# Altium PCB SP3232_module.PcbDoc
Units mm, origin at the board's own origin, x right, y up, seen from the top; angles counter-clockwise.
Board outline 29.34 x 20 mm, 2 copper layers (Top Layer, Bottom Layer), stack 1.569 mm thick; 9 components, 16 nets, 40 pads, 0 vias.
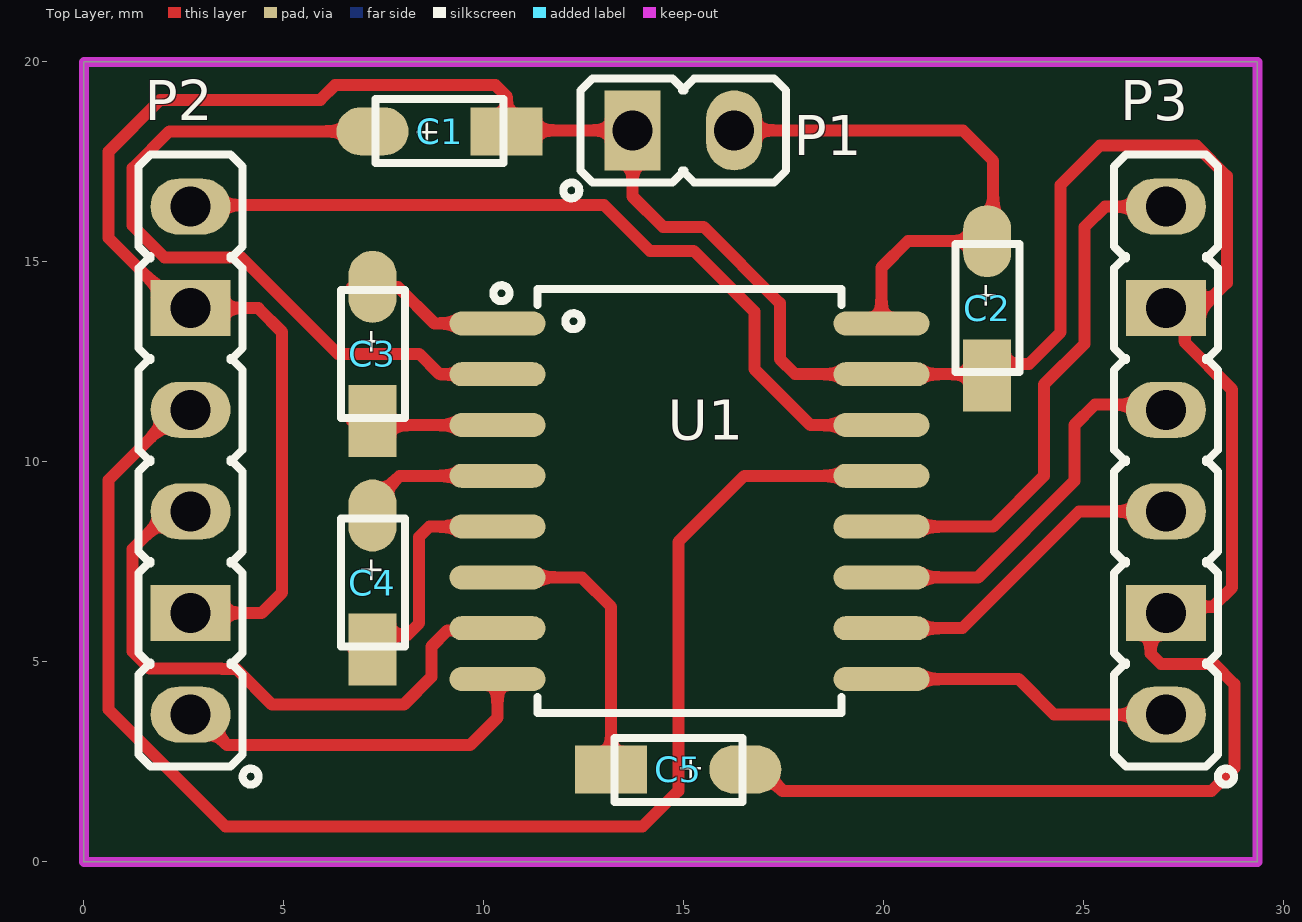
[diagram p0: Top Layer view]
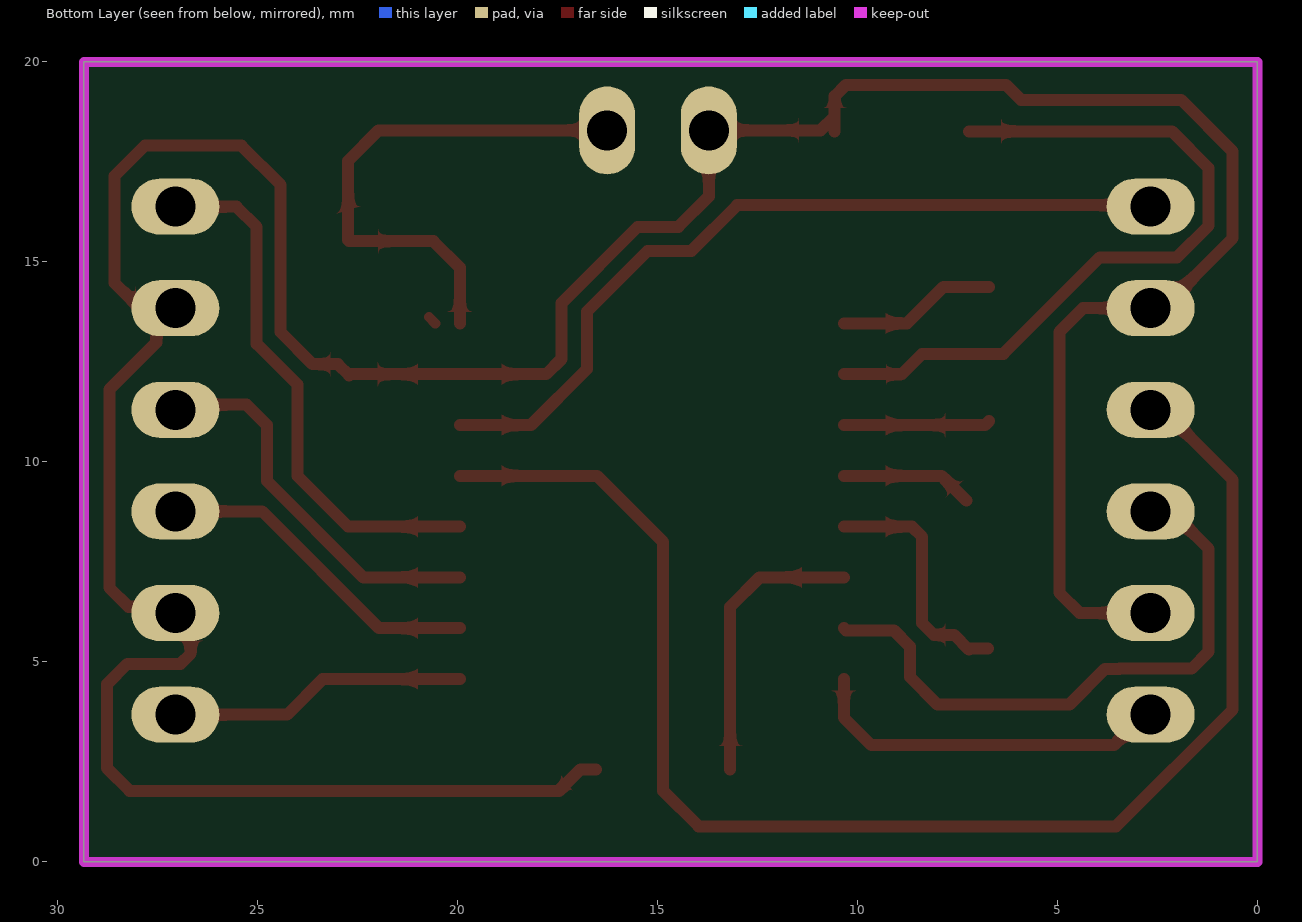
[diagram p1: Bottom Layer view, seen from below]
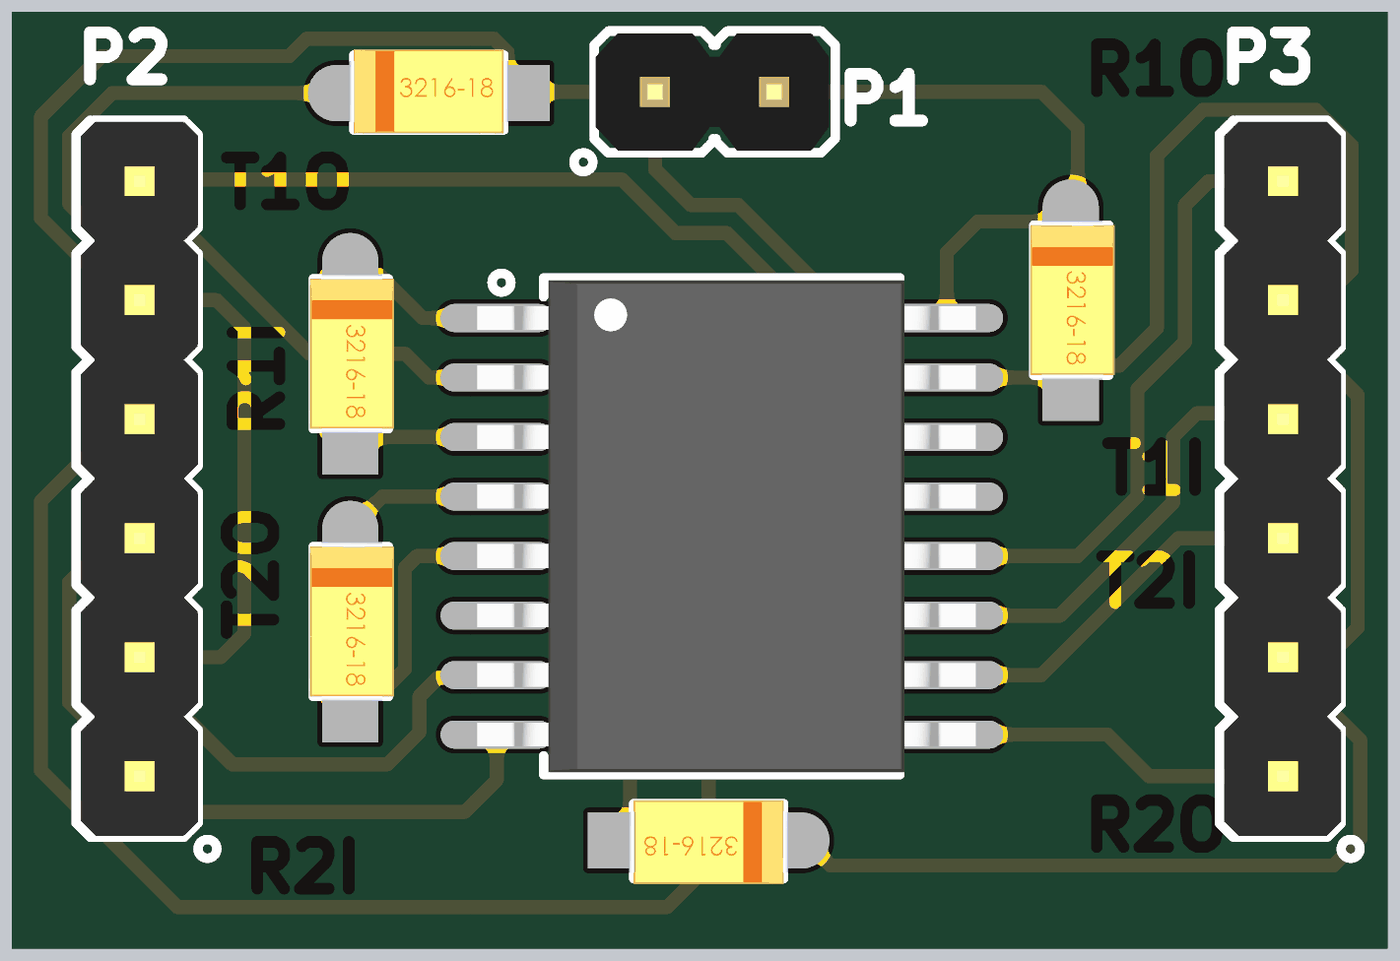
[diagram p2: 3D render of the assembled board from above, using the file's embedded part models]

## Layer stack, top to bottom
Top Solder: solder mask 0.0254, SM-001, Dk 4
Top Layer: signal copper 0.035
Dielectric 1: core 1.4986, Core-043, Dk 4.3
Bottom Layer: signal copper 0.035
Bottom Solder: solder mask 0.0254, SM-001, Dk 4

## Board outline
0,0 0,20 29.337,20 29.337,0

## Design rules (kind name [scope] priority, off if disabled: settings)
Clearance [All] p1: gap=0.3 ignorepadtopadclearanceinfootprint=FALSE
PolygonConnect [All] p1: connectstyle=Relief reliefconductorwidth=0.254 reliefentries=4 polygonreliefangle="90 Angle" airgapwidth=0.254
RoutingVias [All] p1: holewidth=0.711 width=1.27 viastyle="Through Hole" minholewidth=0.711 minwidth=1.27 maxholewidth=0.711 maxwidth=1.27
SolderMaskExpansion [All] p1: expansion=0.102 istentingtop=FALSE
Width [All] p1: maxlimit=0.3 minlimit=0.3 preferedwidth=0.3
30 further rules are at their usual default settings.

## Components (designator, comment, footprint, x,y, rotation, side; value= is the part's Value field where it differs from the comment)
C1 "100nf" CAP_SMD_A 8.89,18.288 r0 top
C2 "100nf" CAP_SMD_A 22.606,13.843 r270 top
C3 "100nf" CAP_SMD_A 7.239,12.7 r270 top
C4 "100nf" CAP_SMD_A 7.239,6.985 r270 top
C5 "100nf" CAP_SMD_A 14.859,2.286 r180 top
P1 "Header 2" HDR_M_1X2 14.986,18.288 r0 top
P2 "Header 6" HDR_M_1X6 2.667,10.033 r90 top
P3 "Header 6" HDR_M_1X6 27.051,10.033 r90 top
U1 "SP3232E" so_16_w 15.139,9.017 r0 top

## Footprints (in the part's own frame and the unit in brackets; to place one, negate y for a bottom-side part, rotate by r counter-clockwise, add the part's x,y. Pads: shape width x height; smd on the part's side, far side on the other; paste and mask are expansions set on the pad)
CAP_SMD_A [mm]
  oval 1.8x1.2 smd: 1(-1.676,-0.025)
  rect 1.8x1.2 smd: 2(1.676,-0.025)
  silkscreen extent -1.6,-0.81 1.6,0.79, body extent -1.7,-0.89 1.7,0.91, height 1.7
HDR_M_1X2 [mm] "Connector; Header; 2 Position"
  rect 1.4x2 / inner round 1.4 / far side oval 1.4x2.2 hole 1 mask+0.1: 1(-1.27,0)
  oval 1.4x2 / inner round 1.4 / far side oval 1.4x2.2 hole 1 mask+0.1: 2(1.27,0)
  silkscreen extent -3,-1.7 2.57,1.3, body extent -2.54,-1.25 2.44,1.25, height 8.72
HDR_M_1X6 [mm] "Connector; Header; 6 Position"
  oval 1.4x2 / inner round 1.4 / far side oval 1.4x2.2 hole 1 mask+0.1: 1(-6.35,0) 3(-1.27,0) 4(1.27,0) 6(6.35,0)
  rect 1.4x2 / inner round 1.4 / far side oval 1.4x2.2 hole 1 mask+0.1: 2(-3.81,0) 5(3.81,0)
  silkscreen extent -8.1,-1.7 7.65,1.3, body extent -7.62,-1.3 7.62,1.19, height 8.54
so_16_w [mm] "SOP, SOIC, 7.5mm width, 1.27mm pitch,"
  oval 2.4x0.6 smd: 1(-4.8,4.445) 2(-4.8,3.175) 3(-4.8,1.905) 4(-4.8,0.635) 5(-4.8,-0.635) 6(-4.8,-1.905) 7(-4.8,-3.175) 8(-4.8,-4.445) 9(4.8,-4.445) 10(4.8,-3.175) 11(4.8,-1.905) 12(4.8,-0.635) 13(4.8,0.635) 14(4.8,1.905) 15(4.8,3.175) 16(4.8,4.445)
  silkscreen extent -4.9,-5.3 3.8,5.4, body extent -5.21,-5.25 5.42,5.25, height 2.62

## Part data
C1 C2 C3 C4 C5: library part Cap2, "Capacitor, pol", PackageDescription="Capacitor; 2 Leads", PackageReference=CAPR5-4X5, Published=23-Sep-2002, Publisher="Altium Limited"
P1: "Header, 2-Pin", LatestRevisionDate=17-Jul-2002, LatestRevisionNote="Re-released for DXP Platform.", Publisher="Altium Limited"
P2 P3: "Header, 6-Pin", LatestRevisionDate=17-Jul-2002, LatestRevisionNote="Re-released for DXP Platform.", Publisher="Altium Limited"
U1: "TTL to RS232 converter and vise versa"

## Nets (pads, with @x,y where several pads share a name; then routed paths per layer and width w, separated by ;. In a path a pad name is that pad's centre, name@x,y a point inside that pad or via, vN(x,y) a via of type N, cw(c..) or ccw(c..) an arc to the next point about the centre after c; other vN are vias at no path point)
GND: C1.2 C2.2 C5.1 P1.1 P2.2 P2.5 P3.2 P3.5 U1.15 | length 87.7
  Top Layer w0.3: P2.2 4.445,6.223 4.953,6.731 4.953,13.248 4.358,13.843 2.367,13.843 0.617,15.593 0.617,17.762 1.905,19.05 5.91,19.05 6.283,19.423 10.287,19.423 10.566,19.144 C1.2@10.566,18.644 ; C1.2 C1.2@10.566,18.644 ; C5.1 16.928,2.311 17.461,1.778 28.194,1.778 28.76,2.344 28.76,4.445 28.252,4.953 26.924,4.953 26.67,5.207 P3.2@26.67,6.223 ; P3.2 27.206,6.378 28.222,6.378 28.702,6.858 28.702,11.811 27.524,12.989 27.524,13.37 P3.5 27.94,13.843 28.575,14.478 28.575,17.145 27.813,17.907 25.4,17.907 24.419,16.926 24.419,13.243 23.622,12.446 22.987,12.446 22.708,12.167 22.682,12.192 U1.15 17.78,12.192 17.399,12.573 17.399,13.97 15.494,15.875 14.478,15.875 13.716,16.637 P1.1 10.922,18.288 C1.2@10.566,18.644
NetC1_1: C1.1 U1.2 | length 18.5
  Top Layer w0.3: C1.1 2.134,18.263 1.217,17.346 1.217,15.907 2.011,15.113 3.937,15.113 6.35,12.7 8.382,12.7 8.89,12.192 U1.2
NetC3_1: C3.1 U1.1 | length 4
  Top Layer w0.3: C3.1@6.706,14.376 7.849,14.376 8.763,13.462 U1.1
NetC3_2: C3.2 U1.3 | length 3.7
  Top Layer w0.3: C3.2@6.706,11.024 6.807,10.922 U1.3
NetC4_1: C4.1 U1.4 | length 3.3
  Top Layer w0.3: C4.1@7.277,9.035 7.894,9.652 U1.4
NetC4_2: C4.2 U1.5 | length 6.1
  Top Layer w0.3: C4.2@6.731,5.334 C4.2@7.214,5.334 ; C4.2 7.58,5.675 8.088,5.675 8.382,5.969 8.382,8.128 8.636,8.382 U1.5
NetC5_2: C5.2 U1.6 | length 7.2
  Top Layer w0.3: U1.6 12.446,7.112 13.183,6.375 C5.2
R1IN: P2.4 U1.13 | length 36.3
  Top Layer w0.3: P2.4 2.367,11.303 0.617,9.553 0.617,3.807 3.535,0.889 13.97,0.889 14.859,1.778 14.859,8.001 16.51,9.652 U1.13
R1OUT: P3.6 U1.12 | length 13.1
  Top Layer w0.3: U1.12 22.733,8.382 24.003,9.652 24.003,11.938 25.019,12.954 25.019,15.875 25.527,16.383 P3.6@26.67,16.383
R2IN: P2.1 U1.8 | length 9.2
  Top Layer w0.3: P2.1 2.821,3.683 3.583,2.921 9.652,2.921 10.339,3.608 U1.8
R2OUT: P3.1 U1.9 | length 7.1
  Top Layer w0.3: U1.9 23.368,4.572 24.257,3.683 P3.1@26.67,3.683
T1IN: P3.4 U1.11 | length 9.4
  Top Layer w0.3: U1.11 22.352,7.112 24.765,9.525 24.765,10.922 25.273,11.43 26.543,11.43 P3.4@26.67,11.303
T1OUT: P2.6 U1.14 | length 20.4
  Top Layer w0.3: P2.6 2.702,16.418 13.006,16.418 14.149,15.275 15.245,15.275 16.764,13.756 16.764,12.319 18.161,10.922 U1.14
T2IN: P3.3 U1.10 | length 7.9
  Top Layer w0.3: U1.10 21.959,5.842 24.88,8.763 P3.3@26.67,8.763
T2OUT: P2.3 U1.7 | length 15.3
  Top Layer w0.3: P2.3 2.155,8.763 1.217,7.825 1.217,5.26 1.644,4.833 3.443,4.833 3.45,4.826 3.81,4.826 4.699,3.937 8.001,3.937 8.689,4.625 8.689,5.387 9.087,5.785 10.282,5.785 U1.7
VCC: C2.1 P1.2 U1.16 | length 13.5
  Top Layer w0.254: U1.16@20.552,13.462 U1.16@20.712,13.622
  Top Layer w0.3: P1.2 21.971,18.288 22.733,17.526 22.733,15.545 22.708,15.519 20.599,15.519 19.939,14.859 U1.16

## Keep-outs
Keep-Out Layer:
  the board outline again, w0.254

## Silkscreen, mask and mechanical layers (free items; w line width, h text height)
Top Solder:
  text "R1O" at 22.733,18.288 h1
  text "T1O" at 4.318,15.875 h1
  text "R1I" at 5.715,10.795 h1 r90
  text "T1I" at 23.114,9.779 h1
  text "T2I" at 22.987,7.366 h1
  text "T2O" at 5.588,6.477 h1 r90
  text "R2O" at 22.733,2.159 h1
  text "R2I" at 4.826,1.27 h1

## Text inside footprints (layer, text, board x,y; h text height)
C1: Top Overlay "+" at 8.23,17.983 h0.6
C2: Top Overlay "+" at 22.301,14.503 h0.6 r270
C3: Top Overlay "+" at 6.934,13.36 h0.6 r270
C4: Top Overlay "+" at 6.934,7.645 h0.6 r270
C5: Top Overlay "+" at 15.519,2.591 h0.6 r180